# Altium PCB Shield.PcbDoc (part 2 of 3)
Units mm, origin at the board's own origin, x right, y up, seen from the top; angles counter-clockwise.
Board outline 69.82 x 93.25 mm, 4 copper layers (Top Layer, Int1 (GND), Int2 (PWR), Bottom Layer), stack 1.586 mm thick; 51 components, 80 nets, 458 pads, 669 vias.
Unrouted connection lines stored in the file: 105.
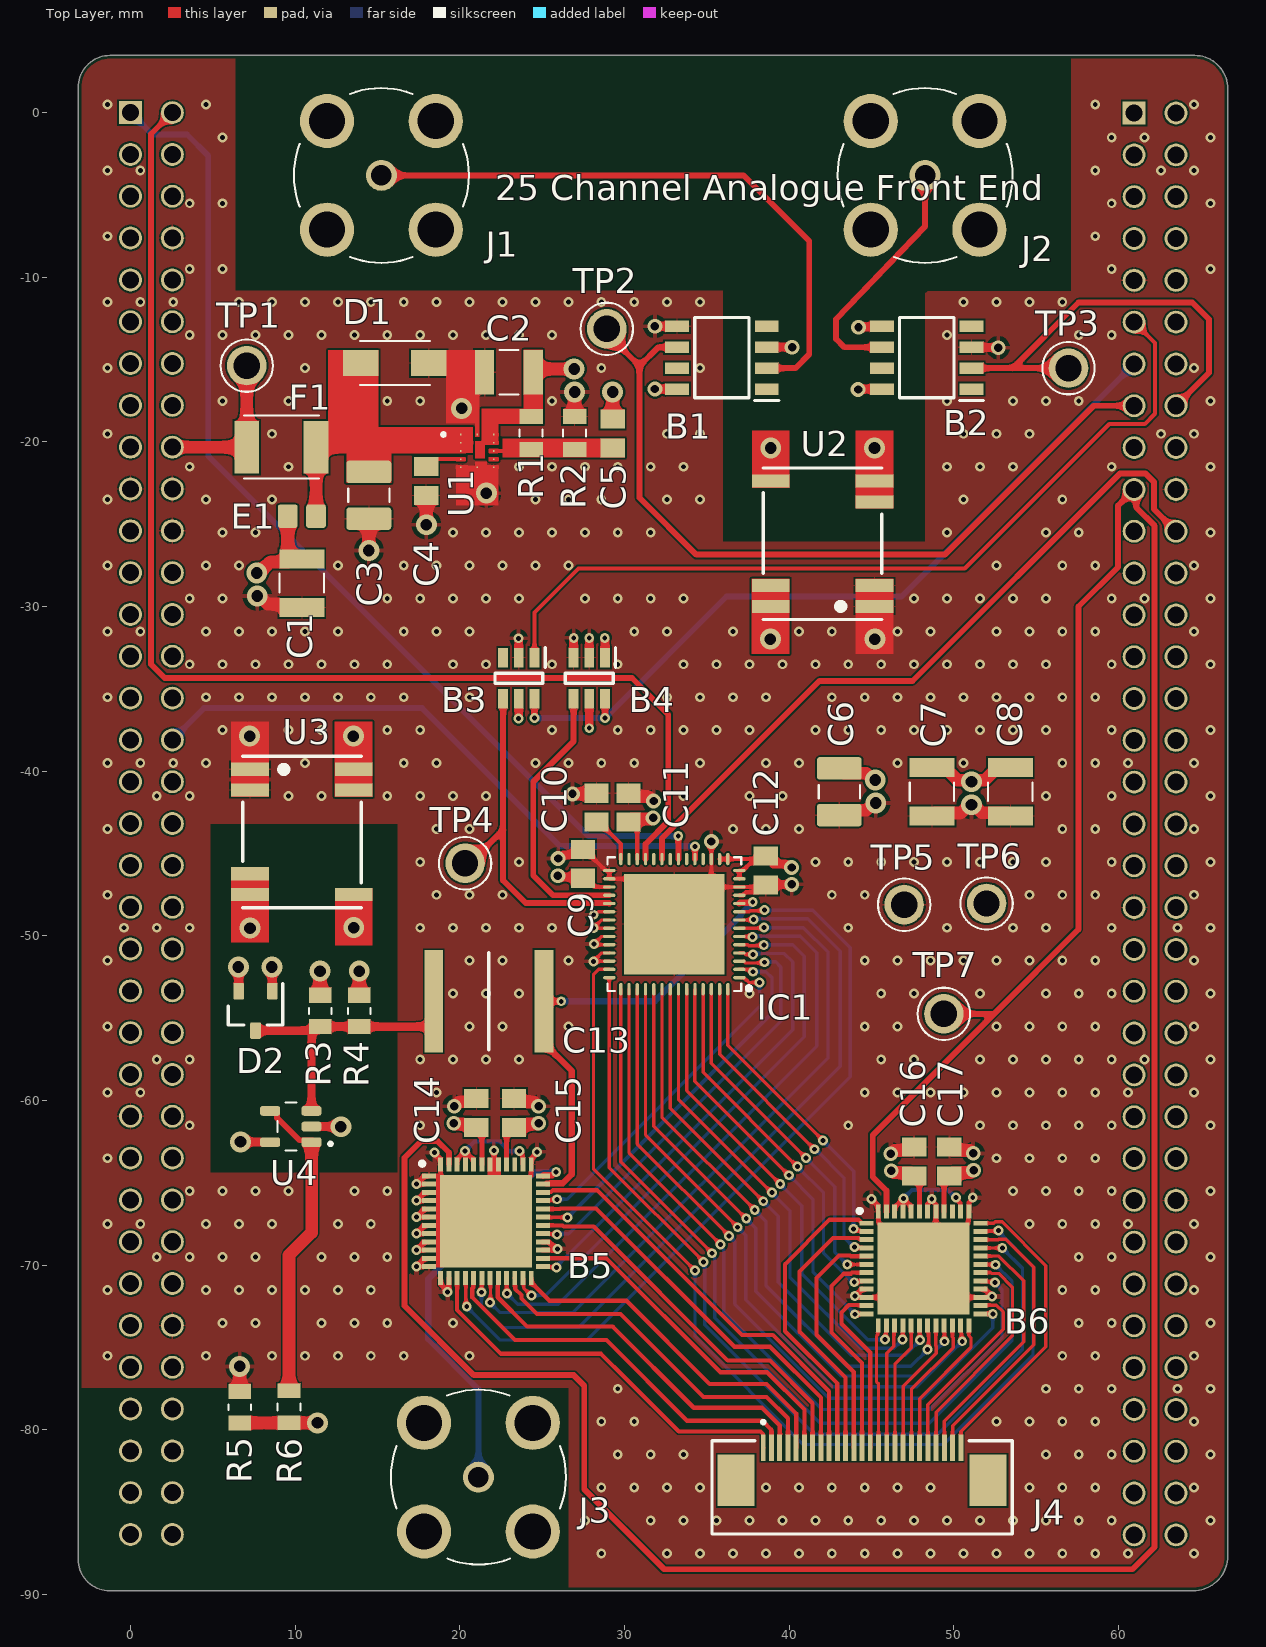
[diagram p0: Top Layer view]

## Via types
v1: diameter 0.6, hole 0.3, Top Layer to Bottom Layer, 618 vias
v2: diameter 1.27, hole 0.711, Top Layer to Bottom Layer, 29 vias
v3: diameter 0.9, hole 0.508, Top Layer to Bottom Layer, 22 vias

## Nets (pads, with @x,y where several pads share a name; then routed paths per layer and width w, separated by ;. In a path a pad name is that pad's centre, name@x,y a point inside that pad or via, vN(x,y) a via of type N, cw(c..) or ccw(c..) an arc to the next point about the centre after c; other vN are vias at no path point) (continued)
CH15: (continued)
  Bottom Layer w0.203: v1(38.953,-65.593) 40.052,-66.692 40.052,-70.736 44.369,-75.052 46.364,-75.052 v1(46.892,-74.524)
CH16: B6.18 IC1.49 | length 32.3
  Top Layer w0.203: IC1.49@32.782,-53.237 32.782,-60.466 v1(38.435,-66.12) ; B6.18@47.916,-73.656 47.933,-73.673 47.933,-74.532 v1(47.95,-74.549)
  Bottom Layer w0.203: v1(38.435,-66.12) 39.335,-67.019 39.335,-71.034 43.764,-75.463 47.063,-75.463 47.95,-74.577 v1(47.95,-74.549)